# EAGLE board untitled (EAGLE 9.6.2)
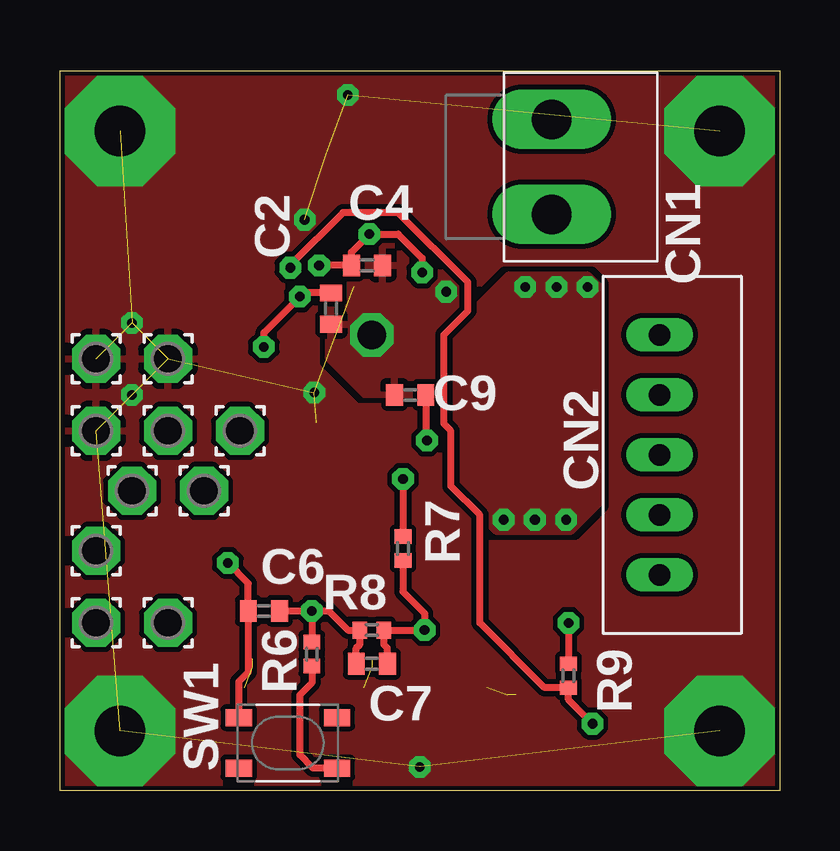
[diagram p0: board, top side]
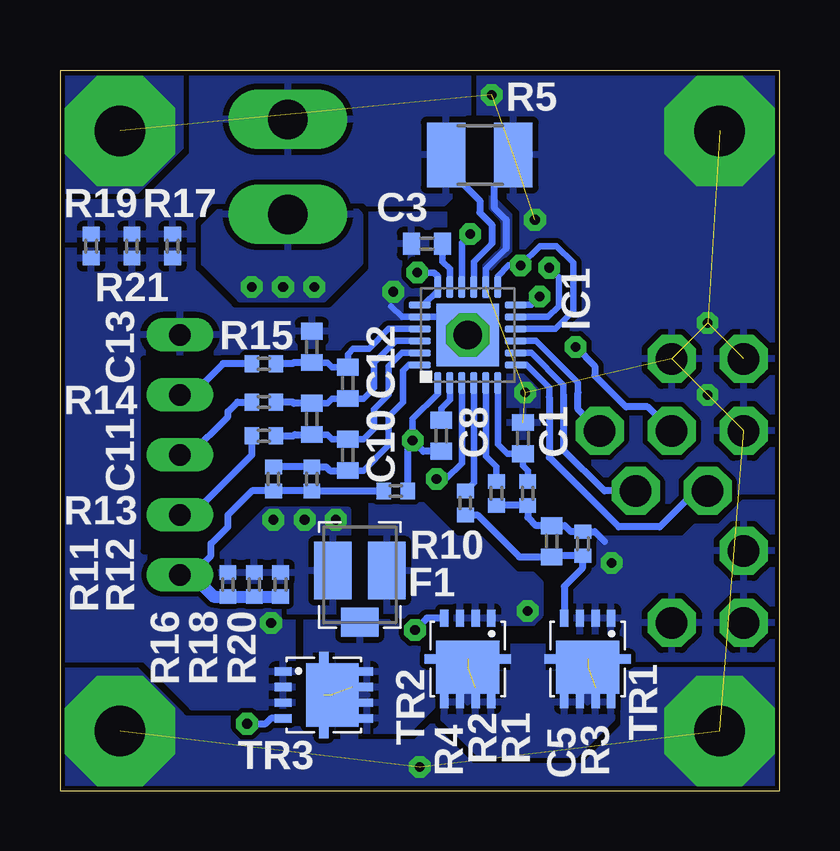
[diagram p1: board, bottom side, seen from below]

Size 30 x 30 mm. Coordinates in mm from the lower left corner, seen from the top.
Outline: 0,30 30,30 30,0 0,0 0,30
Copper layers (1*16): Top 0.035mm / dielectric 1.5mm / Bottom 0.035mm
Design rules "SeeedStudio_2layer_DRU_no_angle_20140221_IMD555 *": minimum track width 0.2mm, minimum drill 0.3mm, track to track 0.21mm, track to pad 0.21mm, pad to pad 0.21mm, via to via 0.21mm, smd to smd 0mil, copper to edge 0.2mm, drill to drill 10mil, minimum pad ring 0.25mm, minimum via ring 0.2mm, stop-mask expansion 0.03mm, vias tented up to drill 5mm, thermal gap 10mil
bRestrict: 9 lines

## Footprints (pad centres in the part's own frame; a part is rotated, then mirrored left to right if it is on the bottom)
C0402 = smd 0.7 x 0.9: 1 -0.65,0; 2 0.65,0
VH-2 = drill 1.65 long: 1 1.98,0; 2 -1.98,0
XH-5 = drill 0.9 long: 1 5,0; 2 2.5,0; 3 0,0; 4 -2.5,0; 5 -5,0
FUSE_ITV4030 = smd 2.4 x 1.55: F1 0.18,1.125; F2 0.18,-1.125 | smd 1.2 x 1.55: H -1.97,0
TQFN24-EP = smd 0.9 x 0.28: 1 -2,1.25; 2 -2,0.75; 3 -2,0.25; 4 -2,-0.25; 5 -2,-0.75; 6 -2,-1.25; 13 2,-1.25; 14 2,-0.75; 15 2,-0.25; 16 2,0.25; 17 2,0.75; 18 2,1.25 | smd 0.28 x 0.9: 7 -1.25,-2; 8 -0.75,-2; 9 -0.25,-2; 10 0.25,-2; 11 0.75,-2; 12 1.25,-2; 19 1.25,2; 20 0.75,2; 21 0.25,2; 22 -0.25,2; 23 -0.75,2; 24 -1.25,2 | smd 2.6 x 2.6: EXP 0,0
2.0/1.3 = drill 1.3 pad 2 octagon: 1 0,0
R0402 = smd 0.6 x 0.7: 1 -0.5,0; 2 0.5,0
R1210 = smd 1.6 x 2.7: 1 -1.4,0; 2 1.4,0
TVAU10-025 = smd 1.1 x 0.7: P$1 -2.05,1.05; P$2 2.05,1.05; P$3 -2.05,-1.05; P$4 2.05,-1.05
TSON_ADVANCE = smd 0.35 x 0.7: 1 -0.975,-1.7; 2 -0.325,-1.7; 3 0.325,-1.7; 4 0.975,-1.7 | smd 0.35 x 1.7: 5 0.975,1.2; 6 0.325,1.2; 7 -0.325,1.2; 8 -0.975,1.2 | smd 0.35 x 0.5: 5_ 0.975,1.8; 8_ -0.975,1.8 | smd 2.65 x 2.2: EP 0,0.35 | smd 3.6 x 0.4: EP2 0,0

## Placement (x,y rotation side)
C1  0.01u  [C0402]  10.7,14.7 90 bottom
C2  0.47u  [C0402]  11.3,20.1 270 top
C3  0.47u  [C0402]  14.7,22.8 180 bottom
C4  0.47u  [C0402]  12.8,21.9 0 top
C5  xxx  [C0402]  9.5,10.4 270 bottom
C6  0.1u  [C0402]  8.5,7.5 0 top
C7  0.1u  [C0402]  13,5.3 0 top
C8  0.47u  [C0402]  14.1,14.8 270 bottom
C9  0.1u  [C0402]  14.6,16.5 180 top
C10  0.01u  [C0402]  18,14 90 bottom
C11  0.01u  [C0402]  19.5,15.5 90 bottom
C12  0.01u  [C0402]  18,17 90 bottom
C13  0.01u  [C0402]  19.5,18.5 90 bottom
CN1  [VH-2]  20.5,26 270 top
CN2  5P_(ICSP)XH  [XH-5]  25,14 270 top
F1  FUSE_3T  [FUSE_ITV4030]  17.5,9 90 bottom
IC1  MAX17320  [TQFN24-EP]  13,19 90 bottom
PAD1  WIREPAD2.0/1.2  [2.0/1.3]  1.5,10 0 top
PAD2  WIREPAD2.0/1.2  [2.0/1.3]  4.5,7 0 top
PAD3  WIREPAD2.0/1.2  [2.0/1.3]  1.5,7 0 top
PAD4  AOLDO  [2.0/1.3]  4.5,15 0 top
PAD5  OD  [2.0/1.3]  6,12.5 0 top
PAD6  DQ  [2.0/1.3]  7.5,15 0 top
PAD7  ALRT  [2.0/1.3]  3,12.5 0 top
PAD8  WIREPAD2.0/1.2  [2.0/1.3]  1.5,15 0 top
PAD9  WIREPAD2.0/1.2  [2.0/1.3]  1.5,18 0 top
PAD10  WIREPAD2.0/1.2  [2.0/1.3]  4.5,18 0 top
R1  1k  [R0402]  10.5,12.4 270 bottom
R2  xxx  [R0402]  11.8,12.4 270 bottom
R3  xxx  [R0402]  8.2,10.3 90 bottom
R4  100  [R0402]  13.1,12 270 bottom
R5  5m  [R1210]  12.5,26.5 0 bottom
R6  1k  [R0402]  10.5,5.7 90 top
R7  100  [R0402]  14.3,10.1 270 top
R8  xxx  [R0402]  13,6.7 180 top
R9  10k  [R0402]  21.2,4.8 270 top
R10  10  [R0402]  16,12.5 180 bottom
R11  100  [R0402]  21.1,13 270 bottom
R12  100  [R0402]  19.5,13 270 bottom
R13  100  [R0402]  21.5,14.8 180 bottom
R14  100  [R0402]  21.5,16.2 180 bottom
R15  100  [R0402]  21.5,17.8 180 bottom
R16  3.3  [R0402]  23,8.6 90 bottom
R17  3.3  [R0402]  25.3,22.7 270 bottom
R18  3.3  [R0402]  21.9,8.6 90 bottom
R19  3.3  [R0402]  28.7,22.7 270 bottom
R20  3.3  [R0402]  20.8,8.6 90 bottom
R21  3.3  [R0402]  27,22.7 270 bottom
SW1  SW_4PTVAU10-025  [TVAU10-025]  9.5,2 0 top
TR1  MOSFET_NTSON  [TSON_ADVANCE]  8,5.5 180 bottom
TR2  MOSFET_NTSON  [TSON_ADVANCE]  13,5.5 180 bottom
TR3  MOSFET_NTSON  [TSON_ADVANCE]  19,4 270 bottom

## Library data of the parts
C1-C13 = rcl; SPICEPREFIX: C
CN1 CN2 = 4 CONNECTOR
F1 IC1 SW1 TR1-TR3 = 0 my parts
PAD1-PAD10 = 4 PAD
R1-R21 = rcl; SPICEPREFIX: R

## Nets
GND: C1.2 IC1.14 PAD8.1 PAD9.1 PAD10.1 R5.2
N$1: CN2.4 R15.2
N$2: IC1.11 R9.2 TR3.4
N$3: C8.1 IC1.2
N$4: CN2.3 R14.2
N$5: C6.2 C7.1 F1.F2 R6.2 R8.2 TR2.1 TR2.2 TR2.3
N$6: CN2.1 R10.2 R11.2 R12.2 R16.1 R18.1 R20.1
N$7: CN2.2 R13.2
N$8: C2.1 IC1.12 PAD4.1
N$9: IC1.3 R7.1
N$10: CN1.1 F1.F1 R16.2 R18.2 R20.2
N$11: TR1.5 TR1.5_ TR1.6 TR1.7 TR1.8 TR1.8_ TR1.EP TR1.EP2 TR2.5 TR2.5_ TR2.6 TR2.7 TR2.8 TR2.8_ TR2.EP TR2.EP2
N$12: IC1.4 R4.1
N$13: C8.2 C9.1 IC1.1 R10.1
N$14: C4.1 IC1.10 IC1.13 IC1.16 IC1.18 IC1.19
N$15: F1.H TR3.5 TR3.5_ TR3.6 TR3.7 TR3.8 TR3.8_ TR3.EP TR3.EP2
N$16: CN1.2 IC1.15 R5.1 R17.1 R19.1 R21.1
N$18: C3.1 IC1.17
N$20: IC1.5 R2.1
N$21: C7.2 R7.2 R8.1 TR2.4
N$22: C1.1 IC1.6 R1.1
N$23: C5.2 R3.1 R4.2 TR1.4
N$24: C5.1 C6.1 PAD1.1 PAD2.1 PAD3.1 R1.2 R2.2 R3.2 SW1.P$1 TR1.1 TR1.2 TR1.3
N$25: IC1.8 PAD5.1
N$26: IC1.9 PAD6.1
N$29: C10.2 C11.1 IC1.23 R13.1
N$30: IC1.7 PAD7.1
N$32: R6.1 SW1.P$4
N$43: C11.2 C12.1 IC1.22 R14.1
N$68: C12.2 C13.1 IC1.21 R15.1
N$69: C10.1 IC1.24 R11.1 R12.1
VSS: C2.2 C3.2 C4.2 C9.2 C13.2 CN2.5 IC1.20 IC1.EXP R9.1 R17.2 R19.2 R21.2 TR3.1 TR3.2 TR3.3

## Tracks (layer width: path | path; a pad name or v marks a point on that pad's centre or on a via)
GND  (via drill 0.4 pad 0.9, 2.1 pad 4.6)  (14 unrouted)
  Bottom 0.27: IC1.14 12.25,21.75 11.4,22.6
  Bottom 0.3: R5.2 11.1,26 11.9,25.2 11.9,24.3 11.4,23.8 11.4,22.6
  other vias: 10.6,16.6 12,29 10.2,23.8 3,19.5 3,16.5 15,1 2.5,2.5 27.5,2.5 27.5,27.5 2.5,27.5
  pour Top (rank 6): 30,0 0,0 0,30 30,30
  pour Bottom (rank 6): 30,0 0,0 0,30 30,30
N$1
  Bottom 0.3: CN2.4 24.5,16.5 23.2,17.8 R15.2
N$2  (via drill 0.4 pad 0.9)
  Top 0.3: v9.6,21.8 9.6,21.9 11.8,24.1 14.1,24.1 17,21.2 17,20 16,19 16,15.3 16.3,15 16.3,12.7 17.5,11.5 17.5,7 20.2,4.3 R9.2 21.2,3.8 v22.2,2.8
  Bottom 0.27: IC1.11 9.65,19.75 9.2,20.2 9.2,21.4 v9.6,21.8
  Bottom 0.3: v22.2,2.8 21.43,2.8 21.2,3.02 TR3.4
N$3
  Bottom 0.27: C8.1 14.1,15.95 13.75,16.3 IC1.2
N$4
  Bottom 0.3: CN2.3 24.6,14 23,15.6 23,15.8 22.6,16.2 R14.2
N$5  (via drill 0.4 pad 0.9)
  Top 0.3: C6.2 v10.5,7.5 | v10.5,7.5 11.2,7.5 12,6.7 R8.2 12.5,6.1 12.35,5.95 C7.1 | v10.5,7.5 R6.2
  pour Bottom: 11,9 10.3,9 10,8.7 10,7.3 10.3,7 15.5,7 16,7.5 16.5,7.5 17,8 17,12 15,12 13.5,10.5 12.5,10.5
N$6
  Bottom 0.3: R10.2 R12.2 R11.2 22,12.5 23,11.5 23,11 23.7,10.3 23.7,9.8 24.5,9
  Bottom 0.5: CN2.1 24.5,9 23.6,8.1 R16.1 R18.1 R20.1
N$7
  Bottom 0.3: CN2.2 24.5,11.5 22,14 R13.2
N$8  (via drill 0.4 pad 0.9)
  Top 0.3: C2.1 10.15,20.75 v10,20.6 8.5,19.1 v8.5,18.5
  Bottom 0.27: IC1.12 10.35,20.25 v10,20.6
  Bottom 0.3: v8.5,18.5 7.7,17.7 7.7,17.3 6.4,16 5.5,16 PAD4.1
N$9  (via drill 0.4 pad 0.9)
  Top 0.3: v14.3,13 R7.1
  Bottom 0.27: IC1.3 13.25,13.65 13.9,13 v14.3,13
N$10  (via drill 0.4 pad 0.9)
  other vias: 21.1,11.3 18.5,11.3 20.7,21 22,21 19.4,21 19.8,11.3
  pour Bottom: 21.4,11.7 23.3,9.8 23.3,8.8 22.5,8 21,8 20.5,7.5 18.5,7.5 18,8 18,11.7
  pour Top: 16,18.8 18.7,21.5 22,21.5 22.5,21 22.5,12 21.3,10.8 18.2,10.8 16.7,12.3 16.7,14.8 16,15.5
  pour Bottom: 17.5,24 18.5,25 22.5,25 24,23.5 24,22 22.5,20.5 19,20.5 17.5,22
N$11  (4 unrouted)
  pour Bottom (rank 3): 7,6 7,3 8.5,1.5 12.5,1.5 14,3 14,6
N$12
  Bottom 0.27: IC1.4 12.75,12.85 R4.1
N$13  (via drill 0.4 pad 0.9)
  Top 0.3: C9.1 15.25,14.65 v15.3,14.6
  Bottom 0.27: IC1.1 14.25,16.55 15.3,15.5 v15.3,14.6
  Bottom 0.3: C8.2 14.85,14.15 v15.3,14.6 15.5,14.4 R10.1
N$14  (via drill 0.4 pad 0.9)
  Top 0.3: v10.8,21.9 C4.1 12.15,22.45 v12.9,23.2 14.1,23.2 15.1,22.2 v15.1,21.6
  Bottom 0.27: IC1.13 11.75,21.45 11.3,21.9 v10.8,21.9 10,22.7 9.3,22.7 8.6,22 8.6,20 9.35,19.25 IC1.10 | IC1.16 13.25,22.85 v12.9,23.2 | IC1.19 14.85,20.25 14.25,20.85 IC1.18 14.25,21.45 14.4,21.6 v15.1,21.6
N$15  (2 unrouted)
  pour Bottom (rank 2): 14.5,7.5 14.5,3.5 15.5,2.5 19.7,2.5 19.7,7.5
N$16
  Bottom 0.27: IC1.15 12.75,22.05 12,22.8
  Bottom 0.3: R5.1 13.9,26 12.5,24.6 12.5,24.1 12,23.6 12,22.8
  pour Bottom (rank 4): 30,24.5 30,23 23,23 21.5,24.5 14,24.5 13,25.5 13,30 24.5,30 24.5,26.5 26.5,24.5
N$18
  Bottom 0.27: IC1.17 13.75,21.75 14.05,22.05 C3.1
N$20
  Bottom 0.27: IC1.5 12.25,13.95 11.8,13.5 R2.1
N$21  (via drill 0.4 pad 0.9)
  Top 0.3: C7.2 13.65,5.95 13.5,6.1 R8.1 v15.2,6.7 15.2,7.4 14.3,8.3 R7.2
  Bottom 0.3: TR2.4 14.7,7.2 v15.2,6.7
N$22
  Bottom 0.27: IC1.6 11.75,14.45 11.35,14.05 C1.1 10.7,13.55 10.5,13.35 R1.1
N$23
  Bottom 0.3: TR1.4 8.97,8.53 8.2,9.3 R3.1 9.5,9.8 C5.2 10.85,9.75 12.6,11.5 R4.2
N$24  (via drill 0.4 pad 0.9)
  Top 0.3: v7,9.5 7.85,8.65 C6.1 7.85,4.95 7.45,4.55 SW1.P$1
  Bottom 0.3: R2.2 R1.2 10.5,11.4 10.15,11.05 C5.1 8.95,11.05 8.7,10.8 R3.2 | 8.3,10.8 R3.2 | R3.2 7.7,10.8 7.3,10.4
  pour Bottom (rank 4): 0,12 0,5.5 9,5.5 9,9 7.5,10.5 4,10.5 3.5,11 2.5,11 1.5,12
N$25
  Bottom 0.27: IC1.8 10.35,18.25 9.01,16.91 9.01,16.5
  Bottom 0.3: PAD5.1 7.3,12.5 9.01,14.21 9.01,16.5
N$26
  Bottom 0.27: IC1.9 10.15,18.75 8.4,17 8.4,16.6
  Bottom 0.3: PAD6.1 8.4,15.9 8.4,16.6
N$29
  Bottom 0.27: IC1.23 15.75,18.25 16.3,17.7 16.3,16.5 16.9,15.9 16.9,15.1 17.35,14.65 C10.2 18.65,14.65 18.85,14.85 C11.1
  Bottom 0.3: R13.1 20.25,14.8 20.2,14.85 C11.1
N$30
  Bottom 0.27: IC1.7 10.55,17.75 9.6,16.8 9.6,16.4
  Bottom 0.3: 9.6,16.4 9.6,13.9 6.7,11 5,11 3.5,12.5 PAD7.1
N$32
  Top 0.3: SW1.P$4 10.55,0.95 10,1.5 10,4 10.5,4.5 R6.1
N$43
  Bottom 0.27: IC1.22 16,18.75 16.9,17.85 16.9,16.8 17.35,16.35 C12.1 18.65,16.35 18.85,16.15 C11.2
  Bottom 0.3: C11.2 20.25,16.15 20.3,16.2 R14.1
N$68
  Bottom 0.27: IC1.21 16.3,19.25 17.12,18.43 17.77,18.43 18,18.2 C12.2 18.65,17.65 18.85,17.85 C13.1
  Bottom 0.3: C13.1 20.25,17.85 20.3,17.8 R15.1
N$69
  Bottom 0.27: IC1.24 15.45,17.75 15.7,17.5 15.7,16.2 16.3,15.6 16.3,14.4 17.35,13.35 C10.1
  Bottom 0.3: C10.1 18.75,13.35 18.9,13.5 R12.1 R11.1
VSS  (via drill 0.4 pad 0.9, 1.2 pad 0.9)
  Top 0.3: v21.2,7 R9.1 | IC1.EXP 12.6,19.4
  Bottom 0.25: 13.75,19.75 IC1.EXP
  Bottom 0.27: 13.75,19.75 IC1.20 15.75,19.75 16.2,20.2
  other vias: 13,19 16.1,20.8
  pour Top: 15.5,19 15.5,17 15,16.5 12.7,16.5 11.2,18 11.2,22.7 12,23.5 14.5,23.5 16.5,21.5 16.5,20
  pour Bottom (rank 5): 30,24.5 30,5.5 26.5,5.5 24.5,3.5 20.3,3.5 20.3,7.3 22,9 22,18.5 17,18.5 14,21.5 14,24.5 13,25.5 13,30 24.5,30 24.5,26.5 26.5,24.5